# Altium PCB MacroQMK.PcbDoc
Units mil, origin at the board's own origin, x right, y up, seen from the top; angles counter-clockwise.
Board outline 3150 x 2955 mil, 2 copper layers (Top Layer, Bottom Layer), stack 61.855 mil thick; 29 components, 42 nets, 126 pads, 0 vias.
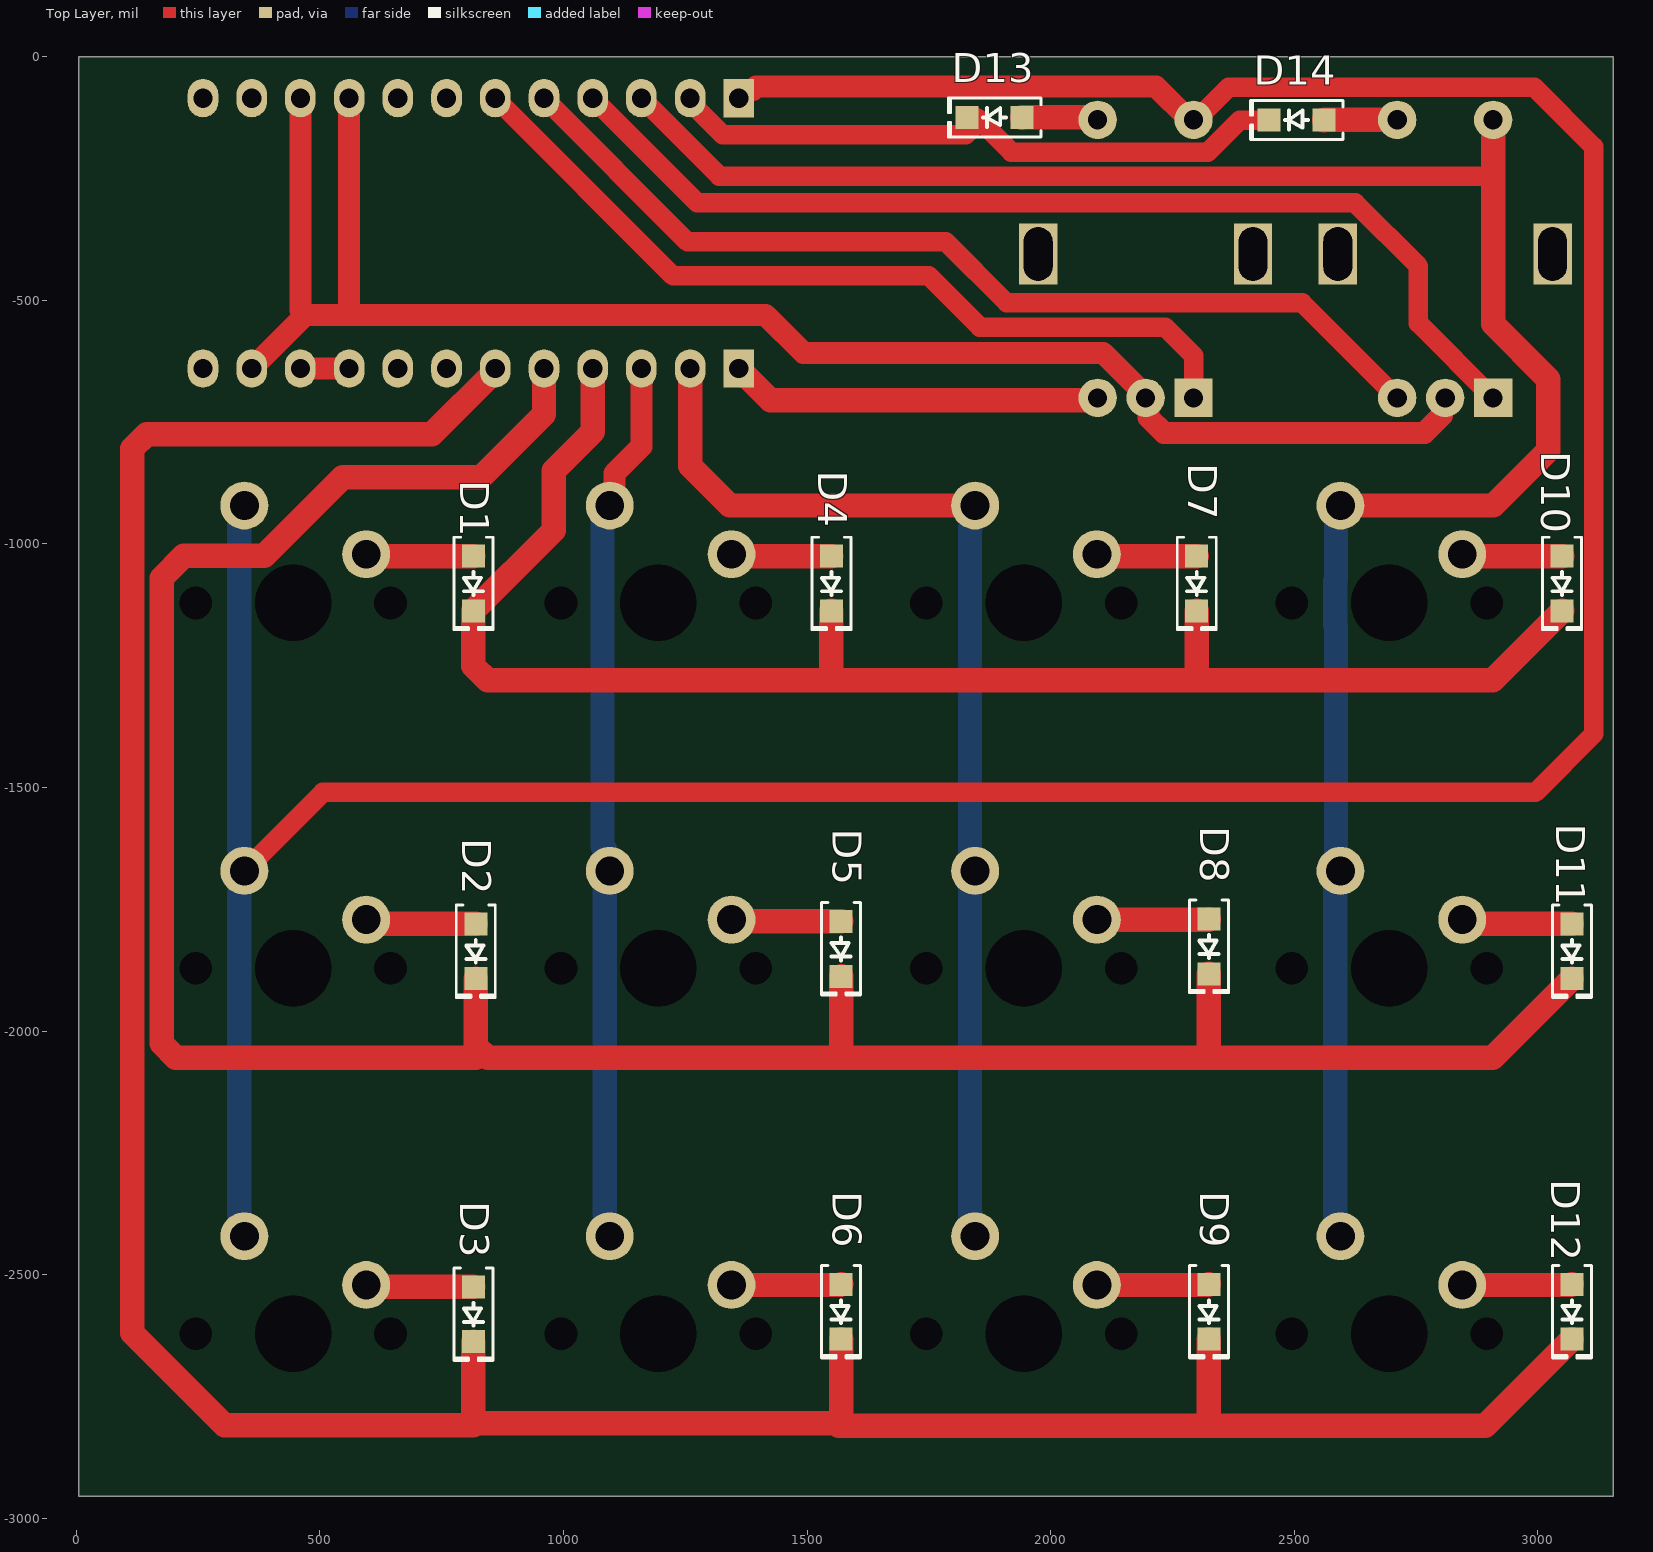
[diagram p0: Top Layer view]
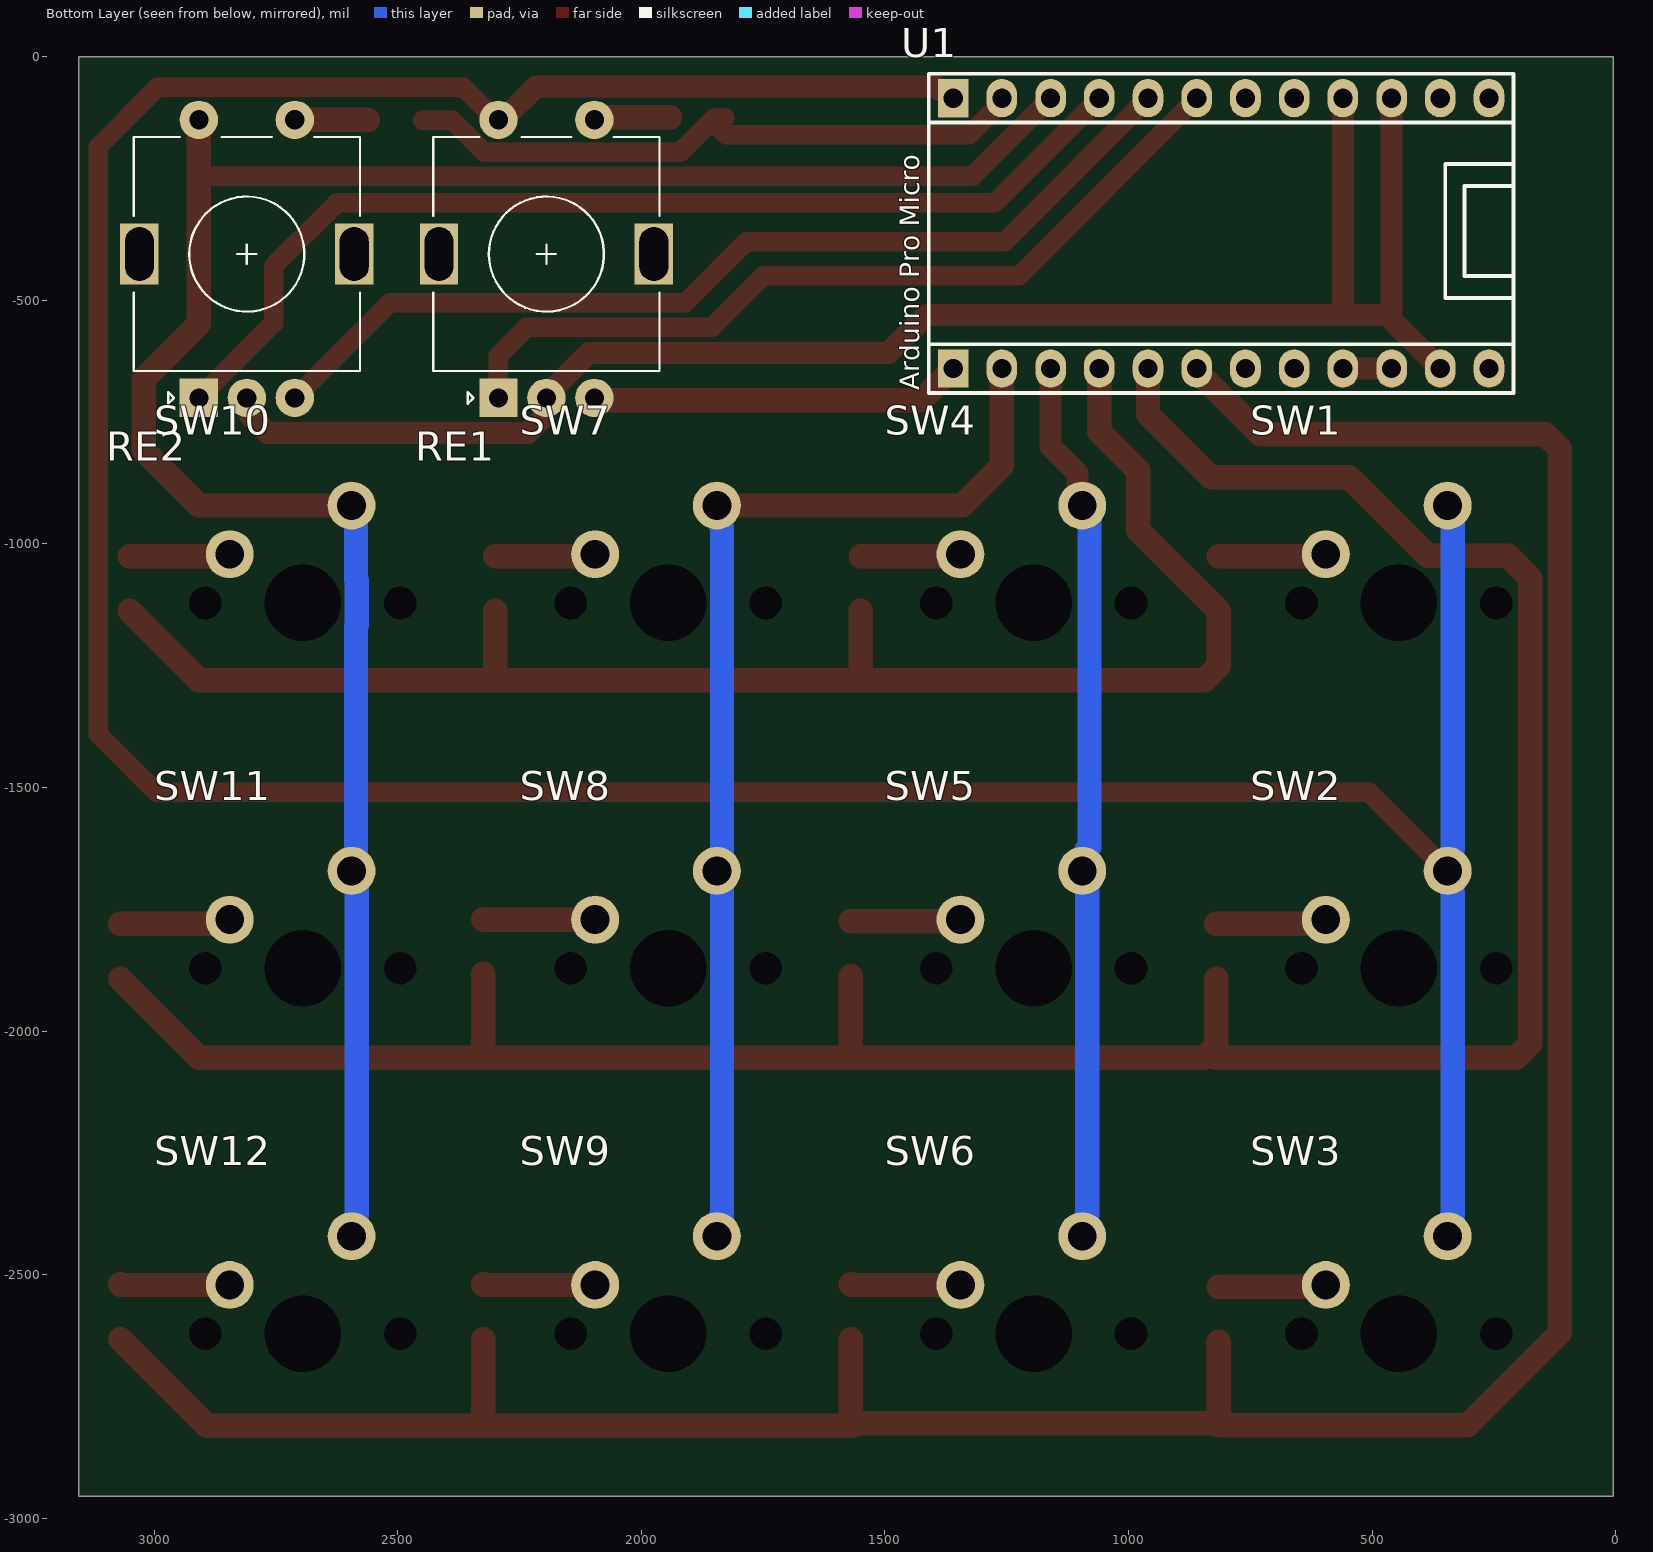
[diagram p1: Bottom Layer view, seen from below]

## Layer stack, top to bottom
Top Solder: solder mask 0.4, Solder Resist, Dk 3.5
Top Layer: signal copper 1.4
Dielectric 1: core 59.0551, FR4, Dk 4.6
Bottom Layer: signal copper 1.4
Bottom Solder: solder mask 0.4, Solder Resist, Dk 3.5

## Board outline
5,-2955 3155,-2955 3155,0 5,0
cut-out: -915,-5000 -905,-5000 -905,-4990 -915,-4990

## Design rules (kind name [scope] priority, off if disabled: settings)
BoardOutlineClearance [All] p1: gap=10 ignorepadtopadclearanceinfootprint=FALSE except(0: Arc-SplitContinuation Track-SplitContinuation SMDPad-SplitContinuation THPad-SplitContinuation Via-SplitContinuation Fill-SplitContinuation Poly-SplitContinuation Region-SplitContinuation Text-SplitContinuation)
Clearance Clearance_RF [InPadClass('RF')] p1: gap=10 ignorepadtopadclearanceinfootprint=FALSE except(20.16: Arc-Poly Track-Poly SMDPad-Poly THPad-Poly Via-Poly Fill-Poly Poly-Poly)
Clearance [All] p2: gap=5.91 ignorepadtopadclearanceinfootprint=FALSE except(3.94: Region-Region; 10: Arc-Poly Track-Poly SMDPad-Poly THPad-Poly Via-Poly Fill-Poly Poly-Poly Poly-Region Poly-Text Poly-Hole)
PolygonConnect [All] p1: thpad.connectstyle=Relief thpad.reliefconductorwidth=10 thpad.reliefentries=4 thpad.polygonreliefangle="90 Angle" thpad.airgapwidth=10 smdpad.connectstyle=Relief smdpad.reliefconductorwidth=14.37 smdpad.reliefentries=4 smdpad.polygonreliefangle="90 Angle" smdpad.airgapwidth=7.87 via.connectstyle=Direct via.reliefconductorwidth=10 via.reliefentries=4 via.polygonreliefangle="90 Angle" via.airgapwidth=10
RoutingVias [All] p1: holewidth=28 width=50 viastyle="Through Hole" minholewidth=28 minwidth=50 maxholewidth=28 maxwidth=50
SolderMaskExpansion [All] p1: expansion=4 istentingtop=FALSE
Width [All] p1: maxlimit=100 minlimit=3.94 preferedwidth=45.35 impedanceprofiledriven=TRUE impedanceprofileid={E40D00CD-2FD9-45DB-8FD6-8CAF1FACEA0F} minimp=50.000000 maximp=50.000000 favimp=50.000000
30 further rules are at their usual default settings.

## Components (designator, comment, footprint, x,y, rotation, side; value= is the part's Value field where it differs from the comment)
D1 "1N4007W" SOD123F 815,-1081.3 r270 top
D2 "1N4007W" SOD123F 820,-1836.3 r270 top
D3 "1N4007W" SOD123F 815,-2581.3 r270 top
D4 "1N4007W" SOD123F 1550,-1081.3 r270 top
D5 "1N4007W" SOD123F 1570,-1831.3 r270 top
D6 "1N4007W" SOD123F 1570,-2576.3 r270 top
D7 "1N4007W" SOD123F 2300,-1081.3 r270 top
D8 "1N4007W" SOD123F 2325,-1826.3 r270 top
D9 "1N4007W" SOD123F 2325,-2576.3 r270 top
D10 "1N4007W" SOD123F 3050,-1081.3 r270 top
D11 "1N4007W" SOD123F 3070,-1836.3 r270 top
D12 "1N4007W" SOD123F 3070,-2576.3 r270 top
D13 "1N4007W" SOD123F 1885,-125 r180 top
D14 "1N4007W" SOD123F 2505,-130 r180 top
RE1 "RotaryEncoder_EC11" RotaryEncoder_EC11 2195,-405 r90 bottom
RE2 "RotaryEncoder_EC11" RotaryEncoder_EC11 2810,-405 r90 bottom
SW1 "Cherry MX" MX_Cherry 445,-1121.3 r180 bottom
SW2 "Cherry MX" MX_Cherry 445,-1871.3 r180 bottom
SW3 "Cherry MX" MX_Cherry 445,-2621.3 r180 bottom
SW4 "Cherry MX" MX_Cherry 1195,-1121.3 r180 bottom
SW5 "Cherry MX" MX_Cherry 1195,-1871.3 r180 bottom
SW6 "Cherry MX" MX_Cherry 1195,-2621.3 r180 bottom
SW7 "Cherry MX" MX_Cherry 1945,-1121.3 r180 bottom
SW8 "Cherry MX" MX_Cherry 1945,-1871.3 r180 bottom
SW9 "Cherry MX" MX_Cherry 1945,-2621.3 r180 bottom
SW10 "Cherry MX" MX_Cherry 2695,-1121.3 r180 bottom
SW11 "Cherry MX" MX_Cherry 2695,-1871.3 r180 bottom
SW12 "Cherry MX" MX_Cherry 2695,-2621.3 r180 bottom
U1 "Arduino Pro Micro" ArduinoProMicro 765,-360 r0 bottom

## Footprints (in the part's own frame and the unit in brackets; to place one, negate y for a bottom-side part, rotate by r counter-clockwise, add the part's x,y. Pads: shape width x height; smd on the part's side, far side on the other; paste and mask are expansions set on the pad)
ArduinoProMicro [mm]
  oval 1.6x2 hole 1: 2(-2.667,-6.985) 3(-0.127,-6.985) 4(2.413,-6.985) 5(4.953,-6.985) 6(7.493,-6.985) 7(10.033,-6.985) 8(12.573,-6.985) 14(10.033,7.112) 15(7.493,7.112) 16(12.573,7.112) 21(-5.207,7.112) 22(-7.747,7.112) 23(-10.287,7.112) 24(-12.827,7.112) A0(4.953,7.112) A1(2.413,7.112) A2(-0.127,7.112) A3(-2.667,7.112) GND(-7.747,-6.985) GND(-5.207,-6.985) RXI(-10.287,-6.985) TXO(-12.827,-6.985)
  rect 1.6x2 hole 1: 9(15.113,-6.985) 10(15.113,7.112)
  silkscreen extent -14.1,-8.25 16.38,8.38
MX_Cherry [mm] "Cherry Key Pad with LED"
  round 2.5 hole 1.5: 1(2.54,5.08) 2(-3.81,2.54)
  round 0 hole 1.702: 6(-5.08,0) 6(5.08,0)
  round 0 hole 3.988: Hole(0,0)
  body extent -7.75,-7.8 7.85,7.8, height 14.9
RotaryEncoder_EC11 [mm]
  rect 2x2 hole 1: A(-7.5,2.5)
  round 2 hole 1: B(-7.5,-2.5) C(-7.5,0) S1(7,-2.5) S2(7,2.5)
  rect 3.2x2 hole 1.5 slot 2.8 at 0 deg: GND(0,-5.6) GND(0,5.6)
  silkscreen extent -7.8,-5.9 6.1,5.9
SOD123F [mm] "SODFL, 2-Leads, Body 1.60x3.50mm, IPC Medium Density"
  rect 1.2x1.2 smd: 1(-1.43,0) 2(1.43,0)
  silkscreen extent -2.41,-1.02 2.41,1.02, body extent -1.75,-0.8 1.75,0.8, height 1.1

## Part data
D1 D2 D3 D4 D5 D6 D7 D8 D9 D10 D11 D12 D13 D14: BOM_Manufacturer="BLUE ROCKET", BOM_Manufacturer Part=1N4007W, BOM_Supplier=LCSC, BOM_Supplier Part=C328592, Contributor=LCEDA_Lib, spicePre=D, spiceSymbolName=1N4007W
SW1 SW2 SW3 SW4 SW5 SW6 SW7 SW8 SW9 SW10 SW11 SW12: library part MX_Cherry
U1: library part ArduinoProMicro

## Nets (pads, with @x,y where several pads share a name; then routed paths per layer and width w, separated by ;. In a path a pad name is that pad's centre, name@x,y a point inside that pad or via, vN(x,y) a via of type N, cw(c..) or ccw(c..) an arc to the next point about the centre after c; other vN are vias at no path point)
CH_COL1: D1.2 D4.2 D7.2 D10.2 U1.15 | length 3305.2
  Top Layer w50: U1.15 1060,-770 980,-850 980,-972.6 D1.2 815,-1250.71 844.29,-1280 1555,-1280 ; D4.2 1550,-1275 1555,-1280 ; D7.2 2300,-1280 ; D10.2 2907.6,-1280 2300,-1280 ; 1555,-1280 2300,-1280
CH_COL2: D2.2 D5.2 D8.2 D11.2 U1.A0 | length 5462.4
  Top Layer w50: 820,-2030.71 844.29,-2055 1575,-2055 ; D2.2 820,-2055 204.29,-2055 175,-2025.71 175,-1070 220.45,-1024.55 385.45,-1024.55 547.06,-862.94 830.67,-862.94 960,-733.61 U1.A0 ; D5.2 1570,-2050 1575,-2055 ; D8.2 2325,-2055 ; D11.2 2907.6,-2055 2325,-2055 ; 1575,-2055 2325,-2055
CH_COL3: D3.2 D6.2 D9.2 D12.2 U1.A1 | length 6272.1
  Top Layer w50: 815,-2805 1570,-2805 ; D3.2 815,-2809.29 304.29,-2809.29 115,-2620 115,-804.29 144.29,-775 730,-775 860,-645 U1.A1 ; D6.2 1570,-2805 ; D9.2 2325,-2810 ; D12.2 2892.6,-2810 2325,-2810 ; 1570,-2805 1565,-2810 2325,-2810
CH_COL4: D13.2 D14.2 U1.8 | length 1304.8
  Top Layer w40: U1.8@1256.56,-89.69 1326.88,-160 1826.3,-160 1845,-141.3 D13.2 ; D13.2@1848.8,-125 1919.58,-195.78 2322.99,-195.78 2388.77,-130 D14.2
CH_ROW1: RE1.S2 SW1.1 SW2.1 SW3.1 U1.9 | length 7471.9
  Top Layer w40: SW2.1 506.3,-1510 2995,-1510 3115,-1390 3115,-185 2993.04,-63.04 2365.28,-63.04 RE1.S2@2303.91,-124.41
  Top Layer w45.35: U1.9 1360,-77.13 1368.82,-68.31 1388.54,-68.31 1395.39,-61.46 2216.44,-61.46 2284.39,-129.41 RE1.S2
  Bottom Layer w50: SW3.1 335.73,-2412.03 335.73,-2377.79 334.5,-2376.56 334.5,-1716.04 335.73,-1714.81 335.73,-1680.57 SW2.1 335.73,-1662.03 335.73,-1627.79 334.5,-1626.56 334.5,-944.9 345,-934.4 SW1.1
CH_ROW2: SW4.1 SW5.1 SW6.1 U1.14 | length 1829.3
  Top Layer w45.35: SW4.1 1104.4,-911.9 1104.4,-855.6 1159.89,-800.11 1159.89,-640.11 U1.14
  Bottom Layer w50: SW6.1 1085.73,-2412.03 1085.73,-2377.79 1084.5,-2376.56 1084.5,-1694.9 1095,-1684.4 SW5.1 1085.73,-1662.03 1085.73,-1627.79 1080,-1622.06 1080,-949.4 1095,-934.4 SW4.1
CH_ROW3: SW7.1 SW8.1 SW9.1 U1.16 | length 2336.1
  Top Layer w50: U1.16 1260,-840 1341.3,-921.3 SW7.1
  Bottom Layer w50: SW9.1 1835.73,-2412.03 1835.73,-2377.79 1834.5,-2376.56 1834.5,-1694.9 1845,-1684.4 SW8.1 1845,-1658.2 1834.5,-1647.7 1834.5,-966.04 1835.73,-964.81 1835.73,-930.57 SW7.1
CH_ROW4: RE2.S2 SW10.1 SW11.1 SW12.1 U1.7 | length 4597.8
  Top Layer w40: U1.7 1320,-245 2908.55,-245 ; 2908.43,-195.78 RE2.S2
  Top Layer w50: SW10.1 2908.7,-921.3 3021.79,-808.21 3021.79,-661.79 2908.55,-548.55 2908.55,-245 RE2.S2@2908.55,-129.53
  Bottom Layer w50: SW12.1 2585.73,-2412.03 2585.73,-2377.79 2584.5,-2376.56 2584.5,-1694.9 2595,-1684.4 SW11.1 2585.73,-1662.03 2585.73,-1168.3 2584.5,-1167.07 2584.5,-1075.53 2585.73,-1074.3 2585.73,-930.57 SW10.1
GND: RE1.C RE2.C U1.23 U1.GND | length 3561.8
  Top Layer w45.35: U1.23 470,-530 ; U1.GND@460,-85 460,-520 470,-530 ; U1.GND@560,-85 560,-525 555,-530 ; RE2.C 2803.61,-706.66 2803.61,-735.85 2767.43,-772.03 2232.56,-772.03 2201.39,-740.85 2201.39,-701.66 2107.49,-607.77 1492.77,-607.77 1415,-530 555,-530 ; 470,-530 555,-530
NetC1_1: 
NetC1_2: 
NetC2_1: 
NetC2_2: 
NetC6_2: 
NetC7_2: 
NetD1_1: D1.1 SW1.2 | length 221.5
  Top Layer w50: SW1.2 598.7,-1025 D1.1
NetD2_1: D2.1 SW2.2 | length 228.6
  Top Layer w50: SW2.2 603.7,-1780 D2.1
NetD3_1: D3.1 SW3.2 | length 221.5
  Top Layer w50: SW3.2 598.7,-2525 D3.1
NetD4_1: D4.1 SW4.2 | length 206.5
  Top Layer w50: SW4.2 1348.7,-1025 D4.1
NetD5_1: D5.1 SW5.2 | length 226.5
  Top Layer w50: SW5.2 1348.7,-1775 D5.1
NetD6_1: D6.1 SW6.2 | length 225.5
  Top Layer w50: SW6.2 1568.7,-2521.3 D6.1
NetD7_1: D7.1 SW7.2 | length 206.5
  Top Layer w50: SW7.2 2098.7,-1025 D7.1
NetD8_1: D8.1 SW8.2 | length 230.5
  Top Layer w50: SW8.2 2323.7,-1771.3 D8.1
NetD9_1: D9.1 SW9.2 | length 230.5
  Top Layer w50: SW9.2 2323.7,-2521.3 D9.1
NetD10_1: D10.1 SW10.2 | length 206.5
  Top Layer w50: SW10.2 2848.7,-1025 D10.1
NetD11_1: D11.1 SW11.2 | length 228.6
  Top Layer w50: SW11.2 2853.7,-1780 D11.1
NetD12_1: D12.1 SW12.2 | length 225.5
  Top Layer w50: SW12.2 3068.7,-2521.3 D12.1
NetD13_1: D13.1 RE1.S1 | length 156.5
  Top Layer w50: D13.1 1941.89,-124.41 2096.57,-124.41 RE1.S1@2095.86,-123.7
NetD14_1: D14.1 RE2.S1 | length 151.5
  Top Layer w50: D14.1 2561.89,-129.41 RE2.S1 RE2.S1@2710.86,-128.7
NetPC1_1: U1.24
NetR4_2: 
RE_C1: RE1.B U1.10 | length 772.1
  Top Layer w50: U1.10 1360,-647.87 1366.5,-654.37 1374.37,-654.37 1425,-705 2086.85,-705 RE1.B@2096.57,-695.28
RE_C2: RE2.B U1.5 | length 2006.4
  Top Layer w40: U1.5 1255,-380 1785,-380 1910,-505 2516.3,-505 RE2.B
RE_D1: RE1.A U1.4 | length 1734.2
  Top Layer w40: U1.4 1225,-450 1750,-450 1855,-555 2235,-555 2293.43,-613.43 RE1.A@2293.43,-695.28
RE_D2: RE2.A U1.6 | length 2171.8
  Top Layer w40: U1.6 1275,-300 2625.07,-300 2755,-429.93 2755,-546.85 RE2.A
RST: 
SCK: U1.3
SCK_3.3: 
SDA: U1.2
SDA_3.3: 
VCC: U1.21 U1.22 | length 100
  Top Layer w45.35: U1.22 U1.21
VCC_DISPLAY: 
pads on no net: RE1.GND RE2.GND SW1.6 SW1.Hole SW2.6 SW2.Hole SW3.6 SW3.Hole SW4.6 SW4.Hole SW5.6 SW5.Hole SW6.6 SW6.Hole SW7.6 SW7.Hole SW8.6 SW8.Hole SW9.6 SW9.Hole SW10.6 SW10.Hole SW11.6 SW11.Hole SW12.6 SW12.Hole U1.A2 U1.A3 U1.RXI U1.TXO

## Silkscreen, mask and mechanical layers (free items; w line width, h text height)
Board:
  the board outline again, w47.24
Mechanical 4:
  the board outline again, w47.24